# EAGLE board front_fascia_6CT_2mm_BLACK_acrylic_screenprint (EAGLE 9.6.2)

Size 91.4 x 44.3 mm. Coordinates in mm from the lower left corner, seen from the top.
Outline: 12.7,26.2 65.7,26.2
Outline: 65.7,25.7 65.7,10.7
Outline: 65.7,9.2 12.7,9.2
Outline: 12.7,10.2 12.7,25.2
Outline: 87.8,44.3 arc-90 91.4,40.8 91.4,3.6 arc-90 87.8,0 3.6,0 arc-90 0,3.5 0,40.7 arc-90 3.5,44.3 87.8,44.3
Outline: circle at 12.7,31.7 radius 3.04
Outline: circle at 25.7,31.7 radius 3.04
Outline: circle at 38.7,31.7 radius 3.04
Outline: circle at 52.7,31.7 radius 3.04
Outline: circle at 65.7,31.7 radius 3.04
Outline: circle at 78.7,31.7 radius 3.04
Outline: circle at 3.57,40.77 radius 1.7
Outline: circle at 3.56,3.55 radius 1.7
Outline: circle at 87.89,3.56 radius 1.7
Outline: circle at 87.89,40.77 radius 1.7
Copper layers (1*16): Top 0.035mm / dielectric 1.5mm / Bottom 0.035mm
Design rules "default": minimum track width 6mil, minimum drill 0.35mm, track to track 6mil, track to pad 6mil, pad to pad 6mil, via to via 6mil, smd to smd 6mil, copper to edge 40mil, drill to drill 6mil, minimum pad ring 10mil, minimum via ring 8mil, stop-mask expansion 4mil, vias tented up to drill 0mil, thermal gap 10mil

## Placement (x,y rotation side)
LOGO3  OSHW_LOGO_10MILX0200-NT  [OSHW_10X200_NOTEXT]  75.86,16.13 0 top

## Library data of the parts
LOGO3 = ohw-logo

## Text on the board
Dimension: 333 mV CT Sensors | CT 1 | CT 2 | CT 3 | CT 4 | CT 5 | CT 6 | OPEN / HARDWARE | Open | .org
OEM_BLUE: EnergyMonitor